# Altium PCB main.PcbDoc
Units mil, origin at the board's own origin, x right, y up, seen from the top; angles counter-clockwise.
Board outline 6000 x 4000 mil, 2 copper layers (Top Layer, Bottom Layer); 41 components, 36 nets, 116 pads, 0 vias.
Unrouted connection lines stored in the file: 67.
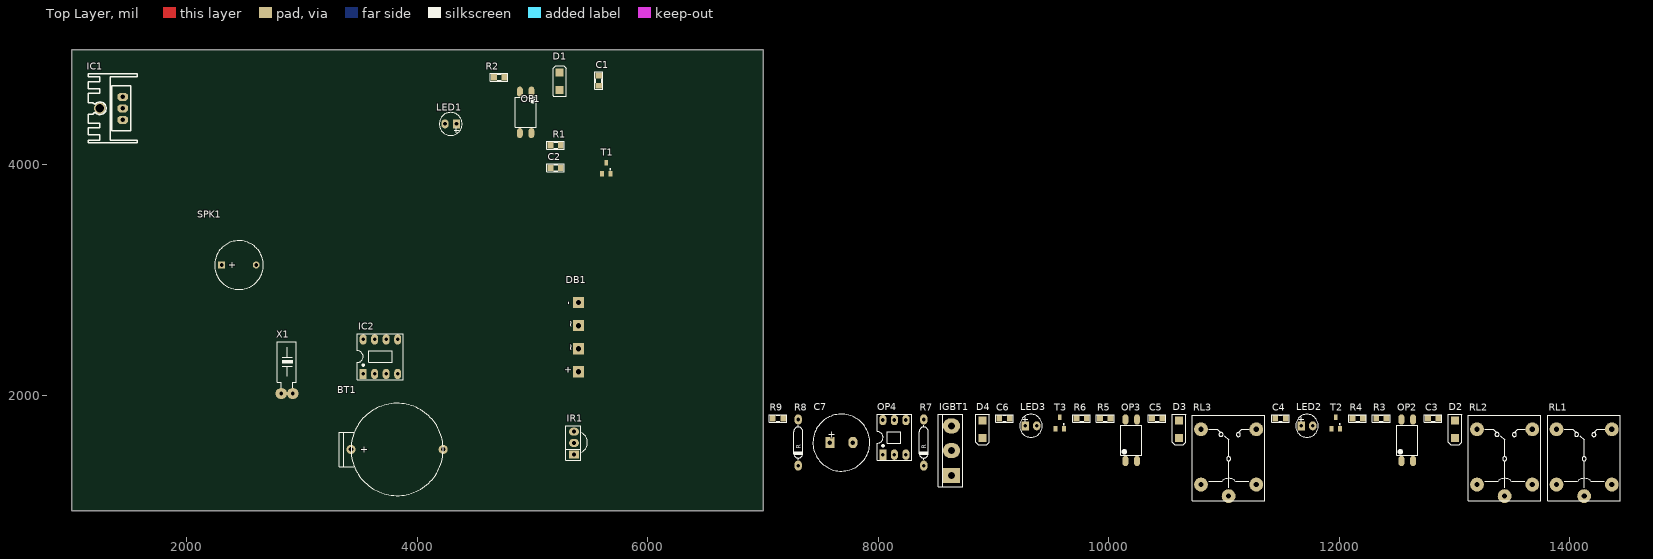
[diagram p0: Top Layer view]
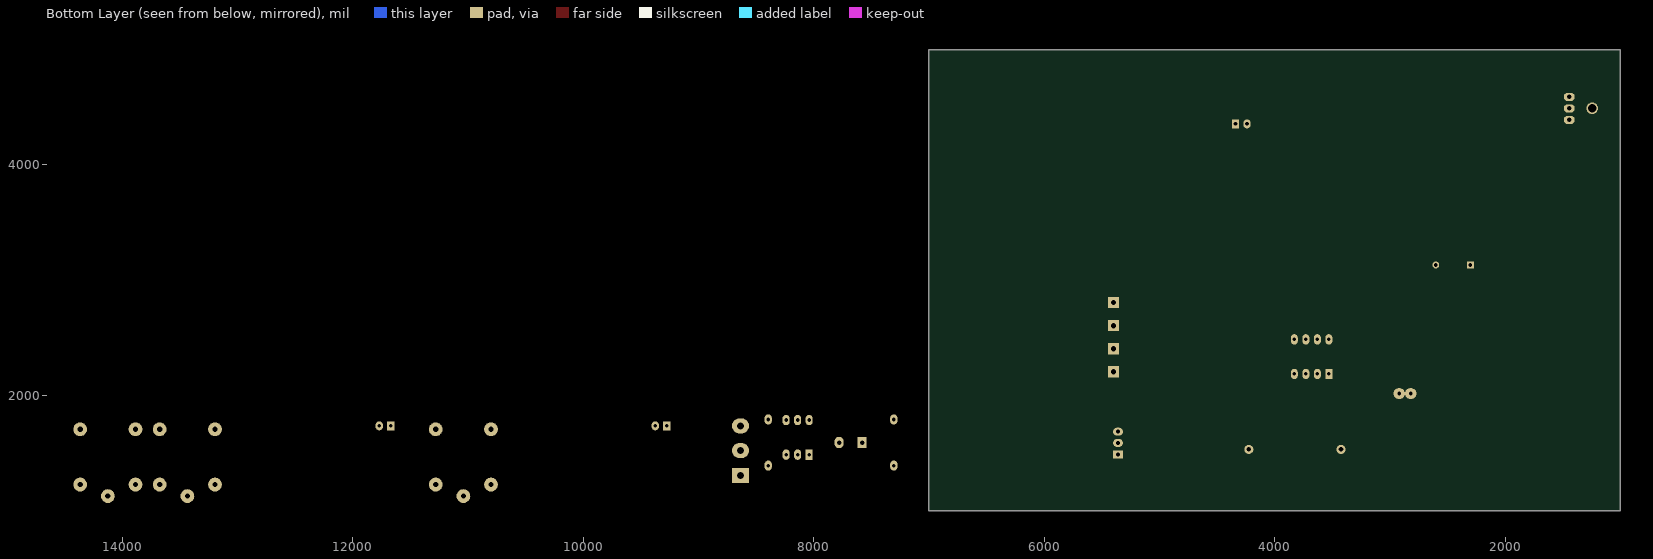
[diagram p1: Bottom Layer view, seen from below]

## Layer stack, top to bottom
Top Solder: solder mask 0.4, Solder Resist, Dk 3.5
Top Layer: signal copper 1.4
Dielectric 1: dielectric 12.6, FR-4, Dk 4.8
Bottom Layer: signal copper 1.4
Bottom Solder: solder mask 0.4, Solder Resist, Dk 3.5

## Board outline
1000,1000 7000,1000 7000,5000 1000,5000

## Design rules (kind name [scope] priority, off if disabled: settings)
Clearance [All] p1: gap=10
PolygonConnect [All] p1: connectstyle=Relief reliefconductorwidth=10 reliefentries=4 polygonreliefangle="90 Angle" airgapwidth=10
RoomDefinition main [InComponentClass('main')] p1: confinementstyle=ConfineIn formatcopy=TRUE lockcomponents=FALSE outline 995,995 6990,995 6990,4980 995,4980
RoutingVias [All] p1: holewidth=28 width=50 viastyle="Through Hole" minholewidth=28 minwidth=50 maxholewidth=28 maxwidth=50
SolderMaskExpansion [All] p1: expansion=4
Width [All] p1: maxlimit=10 minlimit=10 preferedwidth=10
30 further rules are at their usual default settings.

## Components (designator, comment, footprint, x,y, rotation, side; value= is the part's Value field where it differs from the comment)
BT1 "Battery3.3V" "CR2032 Holder" 3425,1530 r0 top
C1 "104" CAP-SMD-0805 5575,4730 r270 top
C2 "104" CAP-SMD-0805 5200,3975 r0 top
C3 "104" CAP-SMD-0805 12815,1800 r0 top
C4 "104" CAP-SMD-0805 11490,1800 r0 top
C5 "104" CAP-SMD-0805 10420,1800 r0 top
C6 "104" CAP-SMD-0805 9095,1800 r0 top
C7 "400V 22uF" CAPP-12mm 7680,1590 r0 top
D1 "DIODE SCHOTTKY" SMA 5235,4725 r270 top
D2 "DIODE SCHOTTKY" SMA 13005,1705 r90 top
D3 "DIODE SCHOTTKY" SMA 10610,1705 r90 top
D4 "DIODE SCHOTTKY" SMA 8905,1705 r90 top
DB1 "KBU1008" "DIODE BRIDGE(FLAT) BIG" 5425,2505 r90 top
IC1 "LM7805" QTO-220H3 1445,4390 r90 top
IC2 "DS1307" DIP8/W0.3 3530,2185 r0 top
IGBT1 "2N60" QTO-247 8635,1305 r90 top
IR1 "IR" IR 5360,1585 r90 top
LED1 "GREEN" "LED-3mm - green" 4290,4355 r180 top
LED2 "GREEN" "LED-3mm - green" 11720,1735 r0 top
LED3 "GREEN" "LED-3mm - green" 9325,1735 r0 top
OP1 "PC-817" OPTO-SMD-PC817x1 4940,4455 r270 top
OP2 "PC-817" OPTO-SMD-PC817x1 12590,1610 r90 top
OP3 "PC-817" OPTO-SMD-PC817x1 10195,1610 r90 top
OP4 "4N35" "DIP6 - white" 8040,1485 r0 top
R1 "1k" R-SMD-0805 5200,4170 r0 top
R2 "1k" R-SMD-0805 4710,4760 r180 top
R3 "1k" R-SMD-0805 12365,1800 r0 top
R4 "1k" R-SMD-0805 12160,1800 r0 top
R5 "1k" R-SMD-0805 9970,1800 r0 top
R6 "1k" R-SMD-0805 9765,1800 r0 top
R7 "1k" "DIEN TRO 1/4 W" 8395,1390 r90 top
R8 "1k" "DIEN TRO 1/4 W" 7305,1390 r90 top
R9 "1k" R-SMD-0805 7130,1800 r0 top
RL1 "5V 10A" RL_SPDT_10A 14125,1125 r90 top
RL2 "5V 10A" RL_SPDT_10A 13435,1125 r90 top
RL3 "5V 10A" RL_SPDT_10A 11040,1125 r90 top
SPK1 "Speaker" SPEAKER-Chip 2302.5,3130 r0 top
T1 "C1815" SOT23B 5640,3970 r0 top
T2 "C1815" SOT23B 11970,1760 r0 top
T3 "C1815" SOT23B 9575,1760 r0 top
X1 "32,768 Khz" XT32k 2820,2015 r90 top

## Footprints (in the part's own frame and the unit in brackets; to place one, negate y for a bottom-side part, rotate by r counter-clockwise, add the part's x,y. Pads: shape width x height; smd on the part's side, far side on the other; paste and mask are expansions set on the pad)
CAP-SMD-0805 [mil] "Compoment SMD 80x50mil"
  rect 50x55 smd: 1(-45,0) 2(45,0)
  silkscreen extent -77,-34 76,33, body extent -40,-27 40,23, height 24
CAPP-12mm [mm]
  rect 2x2.5 hole 1: 1(-2.54,0)
  oval 2x2.5 hole 1: 2(2.54,0)
  silkscreen extent -6.27,-6.29 6.26,6.24, body extent -6.25,-6.25 6.21,6.25, height 2.2
"CR2032 Holder" [mm]
  round 2 hole 1: 1(0,0) 2(20.32,0)
  silkscreen extent -2.54,-10.16 20.32,10.16, body extent -0.93,-10.87 23.57,11.13, height 8.55
"DIEN TRO 1/4 W" [mm]
  oval 2.2x1.6 hole 0.787: 1(0,0) 2(10.16,0)
  silkscreen extent 1.26,-1.02 8.88,1.02, body extent -0.3,-1.16 10.46,1.16, height 2.93
"DIODE BRIDGE(FLAT) BIG" [mil]
  rect 98.43x98.43 hole 47.24: 1(-300,26) 2(-100,26) 3(100,26) 4(300,26)
  body extent -439,-70 439,78, height 956
"DIP6 - white" [mil] "6 PIN, W 300mil, Pin to pin 100mil"
  rect 60x90 hole 31.5: 1(0,0)
  oval 60x90 hole 31.5: 2(100,0) 3(200,0) 4(200,300) 5(100,300) 6(0,300)
  silkscreen extent -50,-50 250,350, body extent -58,-7 260,307, height 170
DIP8/W0.3 [mil] "8 PIN, W 300mil, Pin to pin 100mil"
  rect 60x90 hole 31: 1(0,0)
  oval 60x90 hole 31: 2(100,0) 3(200,0) 4(300,0) 5(300,300) 6(200,300) 7(100,300) 8(0,300)
  silkscreen extent -50,-50 350,350, body extent -50,-40 350,336, height 201
IR [mil] "Receiver Infared IC"
  rect 70x85 hole 35: 1(-100,0)
  oval 70x85 hole 35: 2(1,0) 3(99,0)
  silkscreen extent -150,-117 150,70
"LED-3mm - green" [mm]
  rect 1.6x2 hole 0.8: 1(-1.27,0)
  oval 1.6x2 hole 0.8: 2(1.27,0)
  silkscreen extent -2.52,-2.51 2.51,2.52, body extent -2,-2.05 1.67,1.95, height 5.6
OPTO-SMD-PC817x1 [mm] "SMD"
  oval 2.2x1.3 smd: 1(-4.572,1.27) 2(-4.572,-1.27) 3(4.572,-1.27) 4(4.572,1.27)
  silkscreen extent -3.3,-2.29 3.3,2.29, body extent -5.02,-2.42 5.01,2.42, height 3.95
QTO-220H3 [mil] "TO-220 1-2-3"
  oct 70x90 hole 40: 1(0,0) 2(100,0) 3(200,0)
  round 100 hole 75: 2(100,200)
  silkscreen extent -200,-125 400,300, body extent -190,-102 392,323, height 984
QTO-247 [mil] "TO-247"
  rect 130x150 hole 60: 1(0,0)
  oval 130x150 hole 60: 2(215,0) 3(430,0)
  silkscreen extent -100,-100 530,113, body extent -89,-78 511,102, height 941
R-SMD-0805 [mil] "Resistor Compoment SMD 80x50mil"
  rect 50x55 smd: 1(-45,0) 2(45,0)
  silkscreen extent -77,-34 76,33, body extent -58,-28 60,27, height 21
RL_SPDT_10A [mil] "Relay SPDT, 5 pin, 10A,W 650mil, L 800mil, H 800mil"
  round 120 hole 45: 1(0,0) 2(580,240) 3(580,-240) 4(100,-240) 5(100,240)
  silkscreen extent -40,-315 700,315, body extent -41,-310 711,300, height 614
SMA [mil]
  rect 70x70 smd: 1(74.8,0) 2(-74.8,0)
  silkscreen extent -133,-56 129,59, body extent -72,-35 82,35, height 46
SOT23B [mm] "SOT 23B"
  rect 0.85x1.2 smd: 1(0.94,-1.245) 2(0,1.25) 3(-0.95,-1.25)
  silkscreen extent 0.77,-0.38 1.02,-0.13, body extent -1.5,-1.3 1.5,1.2, height 1.06
SPEAKER-Chip [mm]
  rect 1.5x1.5 hole 0.8: 1(0,0)
  round 1.5 hole 0.8: 2(7.62,0.013)
  silkscreen extent -1.55,-5.38 9.18,5.36, body extent -2.22,-6 13.24,6, height 4.5
XT32k [mil] "Crystal 32k, 2 pin, real timer for DS1307"
  oval 95x100 hole 32: 1(0,0) 2(0,-100)
  silkscreen extent 50,-130 449,36

## Part data
BT1: "Multicell Battery"
C1 C2 C3 C4 C5 C6: library part CAP, "Capacitor"
C7: library part "CAP POL"
D1 D2 D3 D4: "Schottky Diode"
DB1: library part "Diode Bridge KBU1008", "Diode Bridge"
IC1: library part LM78xx, "On ap +, from + 5 to + 24VDC"
IC2: "Real Timer Serial"
IGBT1: library part IGBT-2N60
IR1: "Receiver Infraed IC"
LED1 LED2 LED3: library part LED
OP1 OP2 OP3: library part "Opto 1", "Single"
R1 R2 R3 R4 R5 R6 R7 R8 R9: library part RES, "Resistor 1/4W"
RL1 RL2 RL3: library part RELAY-SPDT
SPK1: "Loudspeaker"
T1 T2 T3: "NPN 600mW, ECB"
X1: library part XT32k, "Crystal 32,768kHz for timer real"

## Nets (pads, with @x,y where several pads share a name; then routed paths per layer and width w, separated by ;. In a path a pad name is that pad's centre, name@x,y a point inside that pad or via, vN(x,y) a via of type N, cw(c..) or ccw(c..) an arc to the next point about the centre after c; other vN are vias at no path point)
+ACPWM: D4.1 DB1.1
DCIN: IC1.1
GND: BT1.2 C2.2 C4.2 C6.2 IC1.2 IC2.4 IR1.2 R9.1 T1.1 T2.1 T3.1
INRL1: LED1.2
INRL2: LED2.2
INRL3: LED3.2
L: DB1.3
N: DB1.2 RL1.1 RL2.1 RL3.1
NetBT1_1: BT1.1 IC2.3
NetC1_2: C1.2 D1.1 RL1.4 T1.2
NetC2_1: C2.1 R2.2 T1.3
NetC3_2: C3.2 D2.1 RL2.4 T2.2
NetC4_1: C4.1 R4.2 T2.3
NetC5_2: C5.2 D3.1 RL3.4 T3.2
NetC6_1: C6.1 R6.2 T3.3
NetC7_1: C7.1 D4.2 R7.2
NetC7_2: C7.2 DB1.4 OP4.4 R8.1
NetIC2_1: IC2.1 X1.1
NetIC2_2: IC2.2 X1.2
NetLED1_1: LED1.1 OP1.2
NetLED2_1: LED2.1 OP2.2
NetLED3_1: LED3.1 OP3.2
NetOP1_1: OP1.1 R1.2
NetOP1_3: OP1.3 R2.1
NetOP2_1: OP2.1 R3.2
NetOP2_3: OP2.3 R4.1
NetOP3_1: OP3.1 R5.2
NetOP3_3: OP3.3 R6.1
NetOP4_2: OP4.2 R9.2
NetOP4_5: OP4.5 R7.1 R8.2
OUTRL1: RL1.3
OUTRL2: RL2.3
OUTRL3: RL3.3
SCL: IC2.6
SDA: IC2.5
VCC: C1.1 C3.1 C5.1 D1.2 D2.2 D3.2 IC1.3 IC2.8 IR1.3 OP1.4 OP2.4 OP3.4 R1.1 R3.1 R5.1 RL1.5 RL2.5 RL3.5
pads on no net: IC2.7 IGBT1.1 IGBT1.2 IGBT1.3 IR1.1 OP4.1 OP4.3 OP4.6 RL1.2 RL2.2 RL3.2 SPK1.1 SPK1.2

## Text inside footprints (layer, text, board x,y; h text height)
BT1: Top Overlay "+" at 3505,1500 h60
C7: Top Overlay "+" at 7560,1630 h60
DB1: Top Overlay "-" at 5335,2786 h56.25 r90; Top Overlay "+" at 5336,2186 h56.25 r90; Top Overlay "~" at 5364,2587 h56.25 r90; Top Overlay "~" at 5364,2384 h56.25 r90
R7: Top Overlay "R" at 8415.5,1537.5 h39.37 r90
R8: Top Overlay "R" at 7325.5,1537.5 h39.37 r90
SPK1: Top Overlay "+" at 2358,3102 h60